# EAGLE board Voltage Controlled Amplifier v1 (EAGLE 6.6.0)
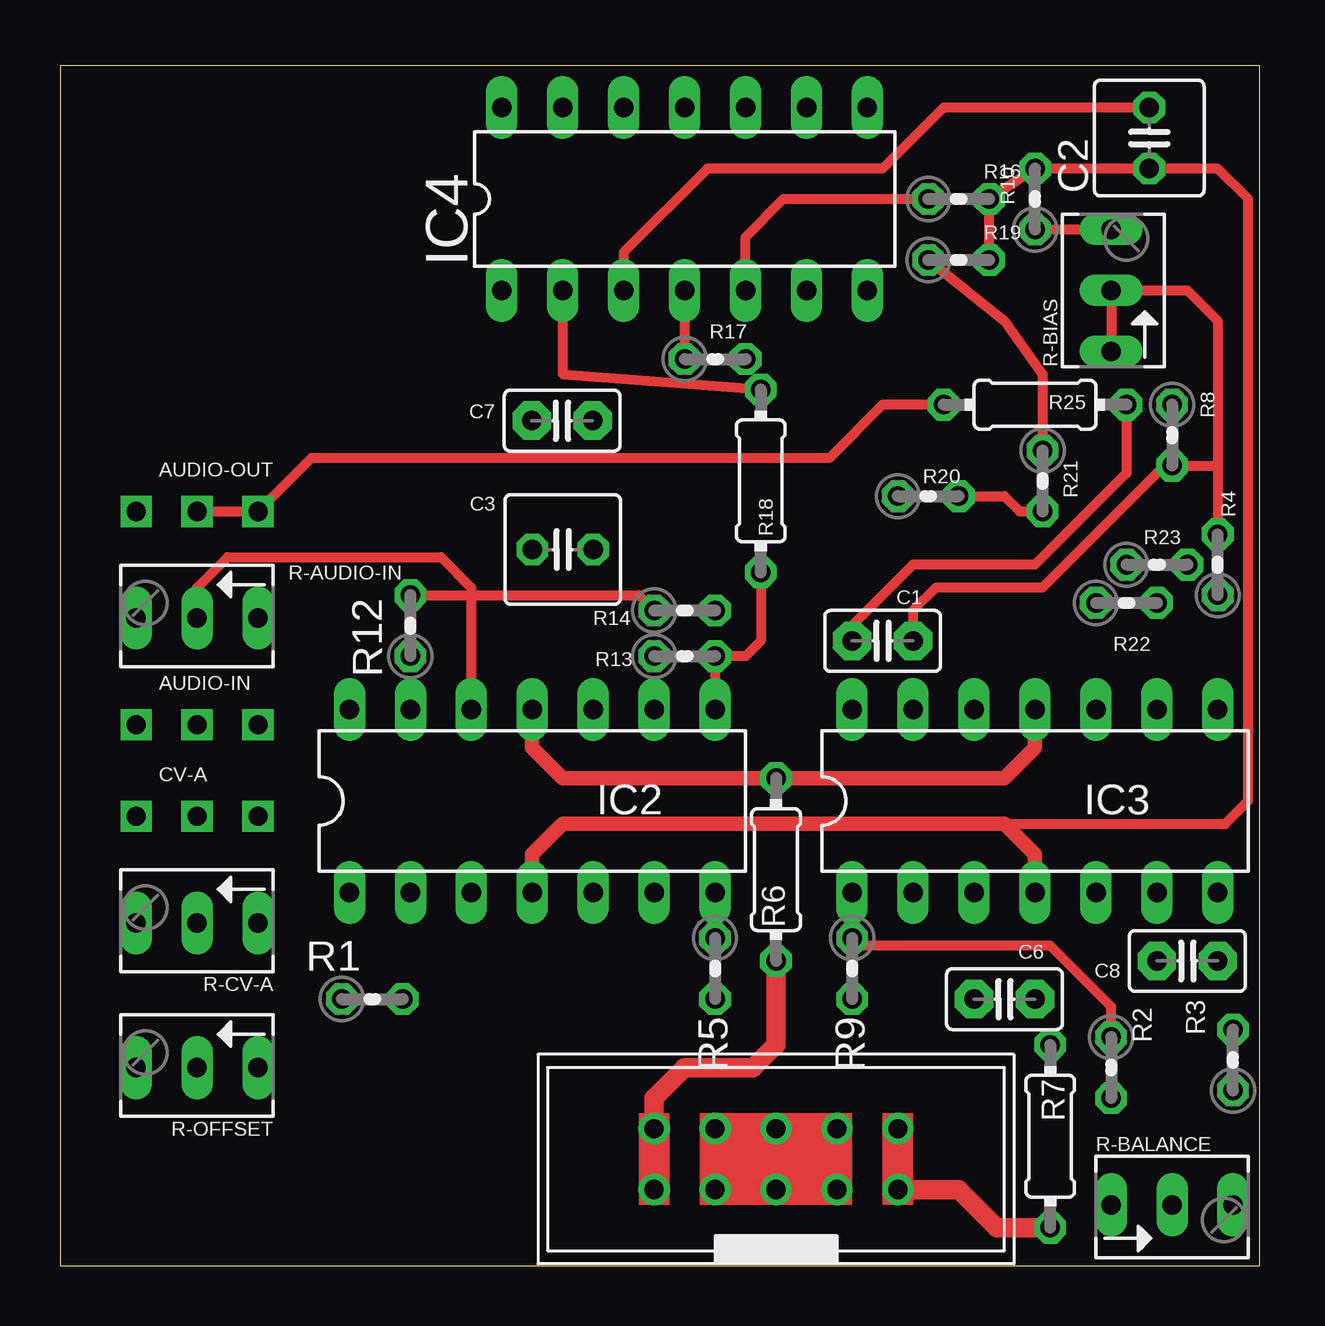
[diagram p0: board, top side]
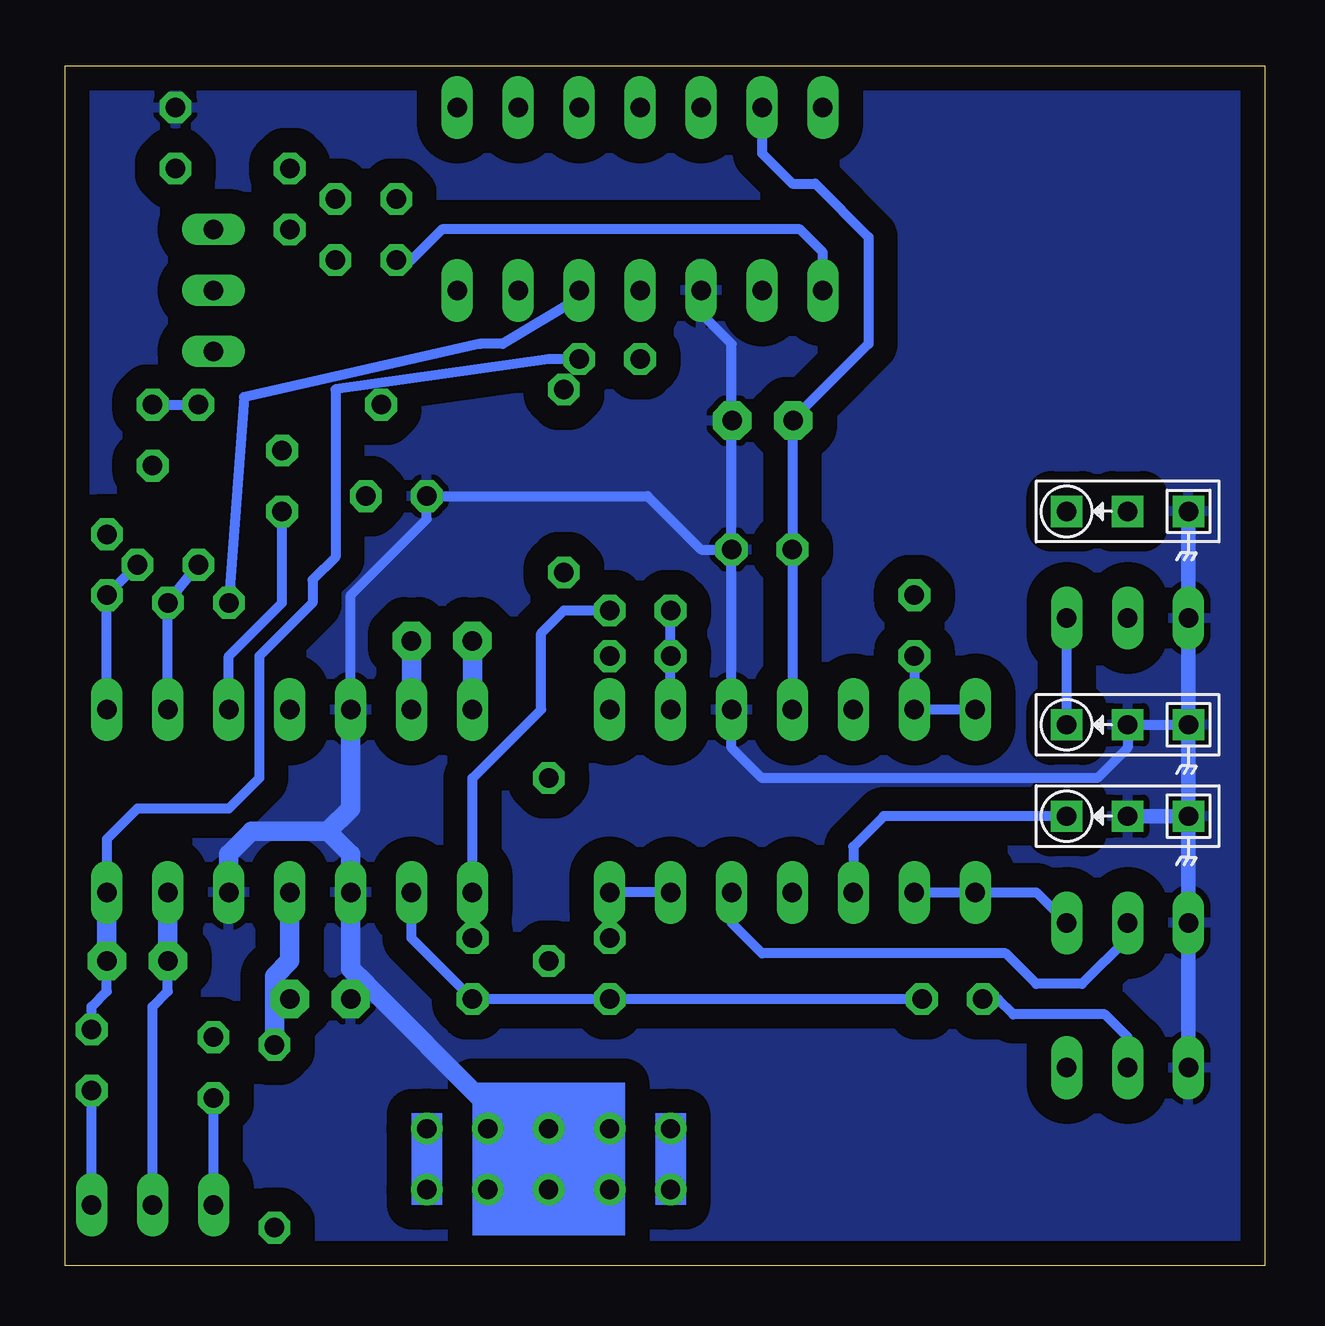
[diagram p1: board, bottom side, seen from below]

Size 50 x 50 mm. Coordinates in mm from the lower left corner, seen from the top.
Outline: 0,0 50,0 50,50 0,50 0,0
Copper layers (1*16): Top 0.035mm / dielectric 1.5mm / Bottom 0.035mm
Design rules "default": minimum track width 10mil, minimum drill 24mil, track to track 8mil, track to pad 8mil, pad to pad 8mil, via to via 8mil, smd to smd 8mil, copper to edge 40mil, drill to drill 8mil, minimum pad ring 10mil, minimum via ring 8mil, stop-mask expansion 4mil, vias tented up to drill 0mil, thermal gap 10mil

## Footprints (pad centres in the part's own frame; a part is rotated, then mirrored left to right if it is on the bottom)
MONO_JACK = drill 0.8 square: P$1 -2.54,0; P$2 2.54,0; P$3 0,0
C2.5-2 = drill 0.813 pad 1.6 octagon: 1 -1.27,0; 2 1.27,0
C025-050X050 = drill 0.813 octagon: 1 -1.27,0; 2 1.27,0
DIL14 = drill 0.813 long: 1 -7.62,-3.81; 2 -5.08,-3.81; 3 -2.54,-3.81; 4 0,-3.81; 5 2.54,-3.81; 6 5.08,-3.81; 7 7.62,-3.81; 8 7.62,3.81; 9 5.08,3.81; 10 2.54,3.81; 11 0,3.81; 12 -2.54,3.81; 13 -5.08,3.81; 14 -7.62,3.81
0204V = drill 0.813 octagon: 1 -1.27,0; 2 1.27,0
0204/7 = drill 0.813 octagon: 1 -3.81,0; 2 3.81,0
B64Y = drill 0.813 long: A 2.54,0; E -2.54,0; S 0,0
EURORACK-POWER = drill 0.8: P$1 -1.27,5.08; P$2 1.27,5.08; P$3 -1.27,2.54; P$4 1.27,2.54; P$5 -1.27,0; P$6 1.27,0; P$7 -1.27,-2.54; P$8 1.27,-2.54; P$9 -1.27,-5.08; P$10 1.27,-5.08

## Placement (x,y rotation side)
AUDIO-IN  I/O  [MONO_JACK]  5.71,22.54 0 top
AUDIO-OUT  I/O  [MONO_JACK]  5.71,31.43 0 top
C1  471pf  [C2.5-2]  34.29,26.04 180 top
C2  100µ  [C025-050X050]  45.4,46.99 90 top
C3  100µ  [C025-050X050]  20.95,29.84 180 top
C6  0.01µ  [C2.5-2]  39.37,11.11 180 top
C7  0.01µ  [C2.5-2]  20.93,35.22 180 top
C8  471pf  [C2.5-2]  46.99,12.7 0 top
CV-A  I/O  [MONO_JACK]  5.71,18.73 0 top
IC2  TL084P  [DIL14]  19.68,19.37 0 top
IC3  TL084P  [DIL14]  40.64,19.37 0 top
IC4  CA3046  [DIL14]  26.04,44.45 0 top
R1  100k  [0204V]  13.02,11.11 0 top
R2  100k  [0204V]  43.81,8.26 270 top
R3  100k  [0204V]  48.9,8.57 90 top
R4  1k  [0204V]  48.26,29.21 90 top
R5  100k  [0204V]  27.3,12.38 270 top
R6  7.5  [0204/7]  29.84,16.51 270 top
R7  7.5  [0204/7]  41.27,5.4 90 top
R8  10k  [0204V]  46.35,34.61 270 top
R9  33k  [0204V]  33.02,12.38 270 top
R10  10k  [0204V]  40.64,44.45 90 top
R12  100k  [0204V]  14.61,26.67 90 top
R13  1k  [0204V]  26.04,25.4 0 top
R14  1k  [0204V]  26.04,27.3 0 top
R16  10k  [0204V]  37.47,44.45 0 top
R17  10k  [0204V]  27.3,37.78 0 top
R18  10k  [0204/7]  29.21,32.7 270 top
R19  10k  [0204V]  37.47,41.91 0 top
R20  100k  [0204V]  36.2,32.07 0 top
R21  100k  [0204V]  40.96,32.7 270 top
R22  100k  [0204V]  44.45,27.62 0 top
R23  100k  [0204V]  45.72,29.21 0 top
R25  1k  [0204/7]  40.64,35.88 180 top
R-AUDIO-IN  100k Log  [B64Y]  5.71,26.99 180 top
R-BALANCE  10k Trim  [B64Y]  46.35,2.54 0 top
R-BIAS  100k Trim  [B64Y]  43.81,40.64 90 top
R-CV-A  100k Log  [B64Y]  5.71,14.29 180 top
R-OFFSET  10k Lin  [B64Y]  5.71,8.26 180 top
U$1  EURORACK-POWER  [EURORACK-POWER]  29.84,4.45 270 top

## Library data of the parts
AUDIO-IN AUDIO-OUT CV-A U$1 = !synth_sch
C1 C6-C8 = capacitor-wima
C2 C3 = rcl
IC2 IC3 = linear
IC4 = !synthdiy
R1-R10 R12-R14 R16-R23 R25 = resistor
R-AUDIO-IN R-BALANCE R-BIAS R-CV-A R-OFFSET = pot

## Nets
5V-REG: R-OFFSET.E
+12V: C2.1 C6.1 IC2.4 IC3.4 R7.2 R10.2 R16.2 R19.2
-12V: C3.2 C7.2 IC2.11 IC3.11 IC4.13 R6.1
GND: AUDIO-IN.P$1 AUDIO-IN.P$3 AUDIO-OUT.P$1 C2.2 C3.1 C6.2 C7.1 CV-A.P$1 CV-A.P$3 IC2.10 IC3.3 IC3.5 IC3.12 IC4.3 R20.1 R-AUDIO-IN.A R-CV-A.A R-OFFSET.A U$1.P$3 U$1.P$4 U$1.P$5 U$1.P$6 U$1.P$7 U$1.P$8
N$1: IC2.6 IC2.7 R5.1
N$2: IC4.4 R17.1
N$3: CV-A.P$2 IC2.3
N$4: IC2.1 IC2.2 R-CV-A.E
N$5: R2.2 R-BALANCE.E
N$6: IC3.2 R1.2 R5.2 R9.2
N$7: R3.1 R-BALANCE.A
N$8: R6.2 U$1.P$9 U$1.P$10
N$9: AUDIO-IN.P$2 R-AUDIO-IN.E
N$10: R7.1 U$1.P$1 U$1.P$2
N$13: R1.1 R-OFFSET.S
N$14: IC2.5 R-CV-A.S
N$15: IC3.1 R2.1 R9.1 R14.2
N$16: R10.1 R-BIAS.A
N$18: IC2.13 IC2.14 R12.1
N$19: IC2.12 R-AUDIO-IN.S
N$20: C1.1 IC3.13 R4.2 R8.2 R-BIAS.E R-BIAS.S
N$21: IC4.2 R18.1
N$22: IC2.9 R12.2 R13.1 R14.1
N$23: C8.2 IC3.7 R3.2 R17.2
N$24: IC4.5 R16.1 R22.1
N$25: C8.1 IC3.6 R-BALANCE.S
N$26: IC4.1 R19.1 R21.1
N$27: IC2.8 R13.2 R18.2
N$28: IC3.10 R20.2 R21.2
N$30: IC3.9 R22.2 R23.1
N$31: IC3.8 R4.1 R23.2
N$32: AUDIO-OUT.P$2 AUDIO-OUT.P$3 R25.2
N$34: C1.2 IC3.14 R8.1 R25.1

## Tracks (layer width: path | path; a pad name or v marks a point on that pad's centre or on a via)
+12V
  Top 0.406: 39.37,18.41 48.58,18.41 49.53,19.37 49.53,44.45 48.26,45.72 C2.1 R10.2 R16.2 R19.2
  Top 0.61: IC2.4 19.68,17.14 20.95,18.41 39.37,18.41 40.64,17.14 IC3.4
  Bottom 0.813: R7.2 41.27,11.75 | 41.27,11.75 41.27,12.06 40.64,12.7 IC3.4 | C6.1 41.27,11.75
-12V
  Top 0.61: IC2.11 19.68,21.59 20.95,20.32 30.16,20.32 | 30.16,20.32 39.37,20.32 40.64,21.59 IC3.11 | R6.1 29.84,20.64 30.16,20.32
  Bottom 0.406: IC4.13 20.95,46.35 19.68,45.09 18.73,45.09 16.51,42.86 16.51,38.42 19.68,35.24 | 19.68,35.24 C3.2 IC2.11 | C7.2 19.68,35.24
GND
  Top 0.406: C2.2 36.83,48.26 34.29,45.72 26.99,45.72 23.5,42.23 IC4.3
  Top 0.813: U$1.P$7 U$1.P$8 U$1.P$6 U$1.P$4 U$1.P$3 U$1.P$5
  Bottom 0.406: AUDIO-IN.P$1 AUDIO-IN.P$3 5.71,21.59 6.99,20.32 20.95,20.32 22.23,21.59 IC2.10 C3.1 | IC4.3 23.5,39.69 22.23,38.42 22.23,35.24 | C3.1 23.5,29.84 25.72,32.07 R20.1 34.92,31.11 38.1,27.94 IC3.12 | C3.1 22.23,35.24 | C7.1 22.23,35.24
  Bottom 0.61: R-AUDIO-IN.A AUDIO-IN.P$1 CV-A.P$1 | CV-A.P$3 CV-A.P$1 | CV-A.P$1 R-CV-A.A R-OFFSET.A AUDIO-OUT.P$1
  Bottom 0.813: IC3.5 43.18,17.14 42.23,18.1 39.05,18.1 | 39.05,18.1 38.1,17.14 IC3.3 38.1,12.38 37.47,11.75 | IC3.12 38.1,19.05 39.05,18.1 | U$1.P$3 32.38,6.67 37.47,11.75 | C6.2 37.47,11.75
  pour Bottom (isolate 1.016): 0,49.53 0,0 49.85,0 49.85,49.85 0,49.85
N$1
  Bottom 0.406: IC2.6 IC2.7 R5.1
N$2
  Top 0.406: IC4.4 R17.1
N$3
  Bottom 0.406: CV-A.P$2 15.88,18.73 17.14,17.46 IC2.3
N$4
  Bottom 0.406: IC2.2 IC2.1 9.53,15.56 R-CV-A.E
N$5
  Bottom 0.406: R-BALANCE.E R2.2
N$6
  Bottom 0.406: R1.2 R5.2 R9.2 35.56,13.65 IC3.2
N$7
  Bottom 0.406: R-BALANCE.A R3.1
N$8
  Top 0.813: U$1.P$10 U$1.P$9 24.77,6.99 26.04,8.26 28.89,8.26 29.84,9.21 R6.2
N$9
  Bottom 0.406: AUDIO-IN.P$2 R-AUDIO-IN.E
N$10
  Top 0.813: U$1.P$1 U$1.P$2 37.47,3.17 39.05,1.59 R7.1
N$13
  Bottom 0.406: R-OFFSET.S 5.71,9.53 6.67,10.48 10.48,10.48 11.11,11.11 R1.1
N$14
  Bottom 0.406: R-CV-A.S 5.71,13.65 7.62,11.75 9.53,11.75 10.79,13.02 20.95,13.02 22.23,14.29 IC2.5
N$15
  Top 0.406: R2.1 43.81,10.79 41.27,13.34 33.34,13.34 R9.1
  Bottom 0.406: R9.1 IC3.1 33.02,20.32 30.16,23.18 30.16,26.35 29.21,27.3 R14.2
N$16
  Top 0.406: R10.1 R-BIAS.A
N$18
  Bottom 0.406: IC2.14 IC2.13 R12.1
N$19
  Top 0.406: R-AUDIO-IN.S 5.71,28.26 6.99,29.53 15.88,29.53 17.14,28.26 IC2.12
N$20
  Top 0.406: C1.1 35.56,27.3 36.51,28.26 40.96,28.26 46.04,33.34 R8.2 48.26,33.34 | R-BIAS.E R-BIAS.S 46.99,40.64 48.26,39.37 48.26,33.34 | 48.26,33.34 R4.2
  Bottom 0.813: C1.1 IC3.13
N$21
  Top 0.406: IC4.2 20.95,37.15 R18.1
N$22
  Top 0.406: R12.2 24.13,27.94 R14.1
  Bottom 0.406: IC2.9 R13.1 R14.1
N$23
  Bottom 0.406: R3.2 48.9,10.79 48.26,11.43 C8.2 | R17.2 29.84,37.78 38.73,36.51 38.73,29.53 39.69,28.57 39.69,27.62 41.91,25.4 41.91,20.32 43.18,19.05 46.99,19.05 48.26,17.78 IC3.7
  Bottom 0.813: C8.2 IC3.7
N$24
  Top 0.406: IC4.5 28.57,42.86 30.16,44.45 R16.1
  Bottom 0.406: IC4.5 28.57,40.32 31.75,38.42 32.7,38.42 42.55,36.2 R22.1
N$25
  Bottom 0.406: R-BALANCE.S 46.35,10.79 45.72,11.43 C8.1
  Bottom 0.813: IC3.6 C8.1
N$26
  Top 0.406: R19.1 39.37,39.37 40.96,37.15 R21.1
  Bottom 0.406: IC4.1 18.41,42.23 19.37,43.18 34.29,43.18 35.56,41.91 R19.1
N$27
  Top 0.406: IC2.8 R13.2 28.57,25.4 29.21,26.04 R18.2
N$28
  Top 0.406: R20.2 39.37,32.07 40.01,31.43 R21.2
  Bottom 0.406: IC3.10 43.18,25.4 40.96,27.62 R21.2
N$30
  Bottom 0.406: R23.1 R22.2 IC3.9
N$31
  Bottom 0.406: R23.2 R4.1 IC3.8
N$32
  Top 0.406: R25.2 34.29,35.88 32.07,33.66 10.48,33.66 AUDIO-OUT.P$2 AUDIO-OUT.P$3
N$34
  Top 0.406: R25.1 44.45,33.02 40.64,29.21 35.56,29.21 33.02,26.67 C1.2
  Bottom 0.406: R8.1 R25.1
  Bottom 0.813: IC3.14 C1.2
(copper drawn outside any net)
  shapes: Bottom area x1